# EAGLE board RF (EAGLE 5.11)
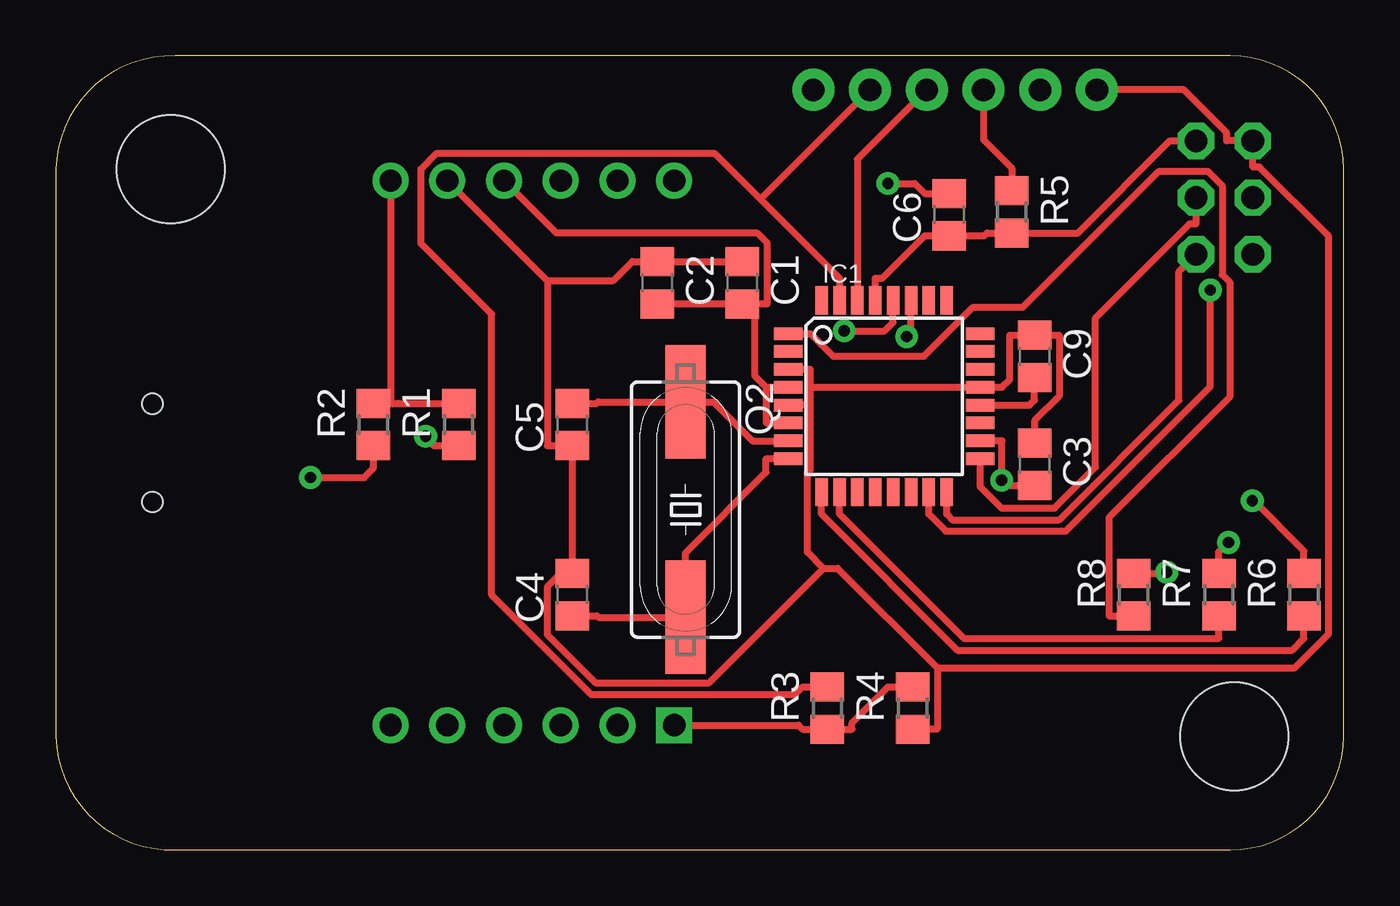
[diagram p0: board, top side]
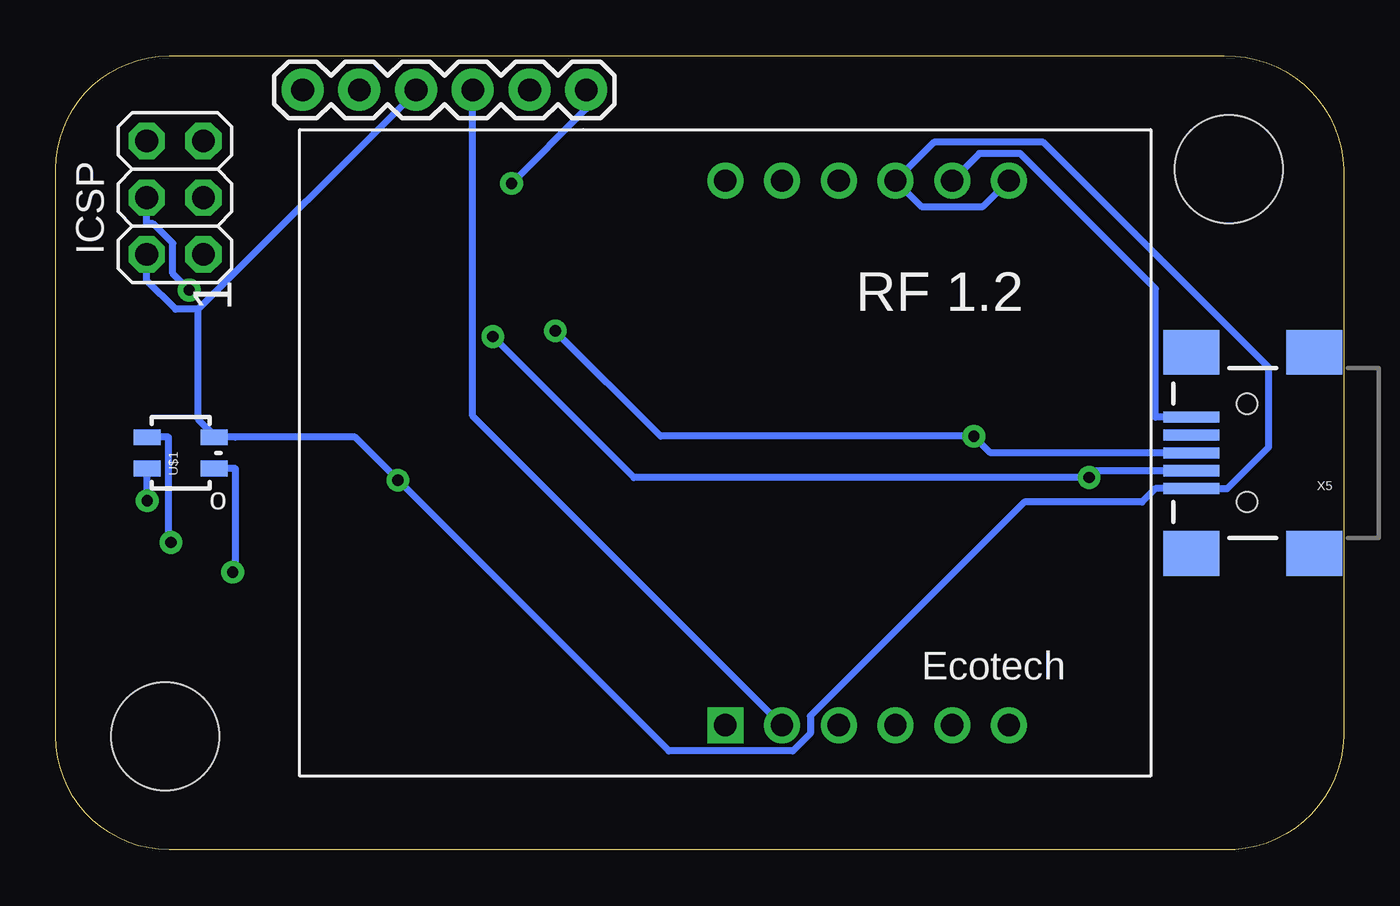
[diagram p1: board, bottom side, seen from below]

Size 57.66 x 35.56 mm. Coordinates in mm from the lower left corner, seen from the top.
Outline: 5.33,0 52.58,0 arc90 57.66,5.08 57.66,30.48 arc90 52.58,35.56 5.33,35.56 arc90 0,30.48 0,5.08 arc90 5.33,0
Copper layers (1*16): Top 0.035mm / dielectric 1.5mm / Bottom 0.035mm
Design rules "SparkFun": minimum track width 8mil, minimum drill 20mil, track to track 8mil, track to pad 8mil, pad to pad 8mil, via to via 8mil, smd to smd 8mil, copper to edge 10mil, drill to drill 8mil, minimum pad ring 12mil, minimum via ring 10mil, stop-mask expansion 4mil, vias tented up to drill 25mil, thermal gap 10mil
Net classes: 0 default: width 0.305 mm, drill 0.305 mm, clearance 0.203 mm; 2 gnd: width 0.305 mm, drill 0.508 mm, clearance 0.203 mm
Holes 4.83 mm at 52.77,5.08 5.14,30.48

## Footprints (pad centres in the part's own frame; a part is rotated, then mirrored left to right if it is on the bottom)
C0805 = smd 1.3 x 1.5: 1 -0.95,0; 2 0.95,0
TQFP32-08 = smd 1.27 x 0.559: 1 -4.293,2.8; 2 -4.293,2; 3 -4.293,1.2; 4 -4.293,0.4; 5 -4.293,-0.4; 6 -4.293,-1.2; 7 -4.293,-2; 8 -4.293,-2.8; 17 4.293,-2.8; 18 4.293,-2; 19 4.293,-1.2; 20 4.293,-0.4; 21 4.293,0.4; 22 4.293,1.2; 23 4.293,2; 24 4.293,2.8 | smd 0.559 x 1.27: 9 -2.8,-4.293; 10 -2,-4.293; 11 -1.2,-4.293; 12 -0.4,-4.293; 13 0.4,-4.293; 14 1.2,-4.293; 15 2,-4.293; 16 2.8,-4.293; 25 2.8,4.293; 26 2,4.293; 27 1.2,4.293; 28 0.4,4.293; 29 -0.4,4.293; 30 -1.2,4.293; 31 -2,4.293; 32 -2.8,4.293
2X03 = drill 1.016 octagon: 1 -2.54,-1.27; 2 -2.54,1.27; 3 0,-1.27; 4 0,1.27; 5 2.54,-1.27; 6 2.54,1.27
FTDI_BASIC = drill 1.016 pad 1.88 round: CTS 10.16,0; DTR 0,0; GND 12.7,0; RXI 2.54,0; TXO 5.08,0; VCC 7.62,0
SM49 = smd 5.08 x 1.778: 1 -4.826,0; 2 4.826,0
R0805 = smd 1.3 x 1.5: 1 -0.95,0; 2 0.95,0
LED-TRICOLOR-SMD = smd 0.7 x 1.2: A 0.7,-1.5; B 0.7,1.5; G -0.7,1.5; R -0.7,-1.5
ECOTECH = drill 1 square: 1 -12.192,1.27 | drill 1 round: 2 -12.192,-1.27; 3 -12.192,-3.81; 4 -12.192,-6.35; 5 -12.192,-8.89; 6 -12.192,-11.43; 7 12.192,-11.43; 8 12.192,-8.89; 9 12.192,-6.35; 10 12.192,-3.81; 11 12.192,-1.27; 12 12.192,1.27
USB-MINIB = smd 2.5 x 0.5: D+ 2.5,0; D- 2.5,0.8; GND 2.5,-1.6; ID 2.5,-0.8; VBUS 2.5,1.6 | smd 2.5 x 2: GND@1 -3,-4.5; GND@2 -3,4.5; GND@3 2.5,4.5; GND@4 2.5,-4.5 | hole 0.9: 0,2.2; 0,-2.2

## Placement (x,y rotation side)
C1  100n  [C0805]  30.73,25.4 270 top
C2  100n  [C0805]  26.92,25.4 270 top
C3  100n  [C0805]  43.81,17.27 270 top
C4  22p  [C0805]  23.11,11.43 90 top
C5  22p  [C0805]  23.11,19.05 270 top
C6  100n  [C0805]  40.01,28.45 90 top
C9  100n  [C0805]  43.81,22.1 90 top
IC1  ATMEGA8  [TQFP32-08]  37.08,20.32 0 top
ICSP  ICSP  [2X03]  52.32,29.21 90 bottom
JP1  FTDI_BASICPTH  [FTDI_BASIC]  33.91,34.04 180 bottom
Q2  16MHz  [SM49]  28.19,15.24 270 top
R1  10K  [R0805]  18.03,19.05 90 top
R2  10K  [R0805]  14.22,19.05 90 top
R3  10K  [R0805]  34.54,6.35 90 top
R4  22k  [R0805]  38.35,6.35 90 top
R5  1K  [R0805]  42.8,28.57 90 top
R6  1K  [R0805]  55.88,11.43 90 top
R7  1K  [R0805]  52.07,11.43 90 top
R8  1K  [R0805]  48.26,11.43 90 top
U$1  LED-TRICOLOR  [LED-TRICOLOR-SMD]  52.07,17.78 90 bottom
U$2  ECOTECH  [ECOTECH]  26.42,17.78 90 bottom
X5  USBSMD  [USB-MINIB]  4.32,17.78 180 bottom

## Library data of the parts
C1-C6 C9 R1-R8 = rcl
IC1 = atmel
ICSP = pinhead
JP1 U$1 X5 = SparkFun
Q2 = crystal
U$2 = Ecotech

## Nets
+5V: C1.2 C2.2 C3.2 IC1.4 IC1.6 IC1.18 ICSP.2 JP1.VCC R1.2 R2.2 R5.2 U$1.A U$2.7 U$2.9 X5.VBUS
BLUE: IC1.10 R7.1
CTS: C6.2 JP1.DTR
GND [gnd]: C1.1 C2.1 C3.1 C4.2 C5.2 C9.2 IC1.3 IC1.5 IC1.21 ICSP.6 JP1.GND R4.1 U$2.8 X5.GND
GREEN: IC1.9 R6.1
MISO: IC1.16 ICSP.1
MOSI: IC1.15 ICSP.4
N$1: IC1.30 JP1.TXO U$2.2
N$2: R6.2 U$1.G
N$3: R7.2 U$1.B
N$4: R8.2 U$1.R
N$5: C9.1 IC1.20
N$6: C5.1 IC1.7 Q2.1
N$7: C4.1 IC1.8 Q2.2
N$8: IC1.27 R2.1 X5.D-
N$9: IC1.28 R1.1 X5.D+
N$11: R3.1 R4.2 U$2.1
N$12: IC1.31 JP1.RXI R3.2
RED: IC1.1 R8.1
RESET: C6.1 IC1.29 ICSP.5 R5.1
SCK: IC1.17 ICSP.3

## Tracks (layer width: path | path; a pad name or v marks a point on that pad's centre or on a via)
+5V  (via drill 0.51 pad 1.02)
  Top 0.305: 31.8,20.72 31.8,19.12 IC1.6 | 31.29,24.45 31.29,21.23 31.8,20.72 | 42.37,16.64 42.34,16.61 v42.34,16.56 | 42.37,16.64 42.37,18.32 IC1.18 | 42.37,16.64 42.4,16.64 42.71,16.32 C3.2 | 31.8,20.72 IC1.4 | 31.29,24.45 31.84,24.45 31.84,27.19 31.39,27.64 22.4,27.64 U$2.9 | 31.29,24.45 C1.2 28.03,24.45 C2.2 | 14.99,20 15.33,20 R1.2 | 14.99,20 R2.2 | U$2.7 14.99,20 | R5.2 42.8,30.53 41.53,31.8 JP1.VCC
  Bottom 0.305: ICSP.2 53.59,25.5 52.3,24.21 51.28,24.21 | JP1.VCC 41.53,33.96 51.28,24.21 | 50.48,18.48 51.28,19.28 51.28,24.21 | 50.48,18.48 50.39,18.48 50.35,18.48 49.61,18.48 44.26,18.48 v42.34,16.56 30.21,4.43 24.66,4.43 23.88,5.21 23.88,6 14.3,15.57 9.03,15.57 8.42,16.18 X5.VBUS 6.01,16.18 5.21,16.18 3.35,18.04 3.35,21.59 13.45,31.69 18.35,31.69 U$2.9 18.9,28.81 16.15,28.81 U$2.7 | 50.48,18.48 U$1.A
BLUE
  Top 0.305: IC1.10 35.08,15.04 40.65,9.47 52.07,9.47 R7.1
CTS  (via drill 0.51 pad 1.02)
  Top 0.305: C6.2 38.9,29.4 38.46,29.84 v37.25,29.84
  Bottom 0.305: JP1.DTR 33.91,33.19 v37.25,29.84
GND
  Top 0.305: 34.37,12.61 33.65,13.34 33.65,16.89 33.78,17.02 33.78,19.92 | 23.11,12.88 22,11.77 22,9.65 24.16,7.49 29.25,7.49 34.37,12.61 | 39.46,8.15 35,12.61 34.37,12.61 | 23.11,12.88 23.11,13.39 23.11,17.09 C5.2 22.01,18.1 22.01,25.5 | 23.11,12.88 C4.2 | 22.01,25.5 24.96,25.5 25.82,26.35 C2.1 C1.1 | 22.01,25.5 22,25.5 U$2.8 | 33.78,20.72 IC1.21 42.37,20.72 42.71,21.06 42.71,23.05 C9.2 44.92,23.05 44.92,20.33 43.81,19.23 C3.1 | 33.78,20.72 33.78,21.52 IC1.3 | 33.78,19.92 33.78,20.72 | 39.46,8.15 55.48,8.15 56.99,9.66 56.99,27.48 53.89,30.58 53.59,30.58 ICSP.6 53.3,31.75 52.42,31.75 52.42,32.11 50.5,34.04 JP1.GND | 39.46,8.15 39.46,5.4 R4.1 | 33.78,19.92 IC1.5
  Bottom 0.305: X5.GND 8.42,19.38 8.42,25.13 14.48,31.18 16.31,31.18 U$2.8
GREEN
  Top 0.305: IC1.9 34.28,15.04 40.38,8.95 55.35,8.95 55.88,9.47 R6.1
MISO
  Top 0.305: IC1.16 39.88,15.04 40.14,14.78 44.92,14.78 50.28,20.14 50.28,25.9 ICSP.1
MOSI  (via drill 0.51 pad 1.02)
  Top 0.305: v51.69,25.07 51.69,20.75 45.21,14.27 39.85,14.27 39.08,15.04 IC1.15
  Bottom 0.305: ICSP.4 53.59,28.04 53.3,28.04 52.42,27.16 52.42,25.81 v51.69,25.07
N$1
  Top 0.305: JP1.TXO 35.88,30.93 IC1.30
  Bottom 0.305: U$2.2 38.99,19.43 JP1.TXO
N$2  (via drill 0.51 pad 1.02)
  Top 0.305: v53.57,15.64 53.62,15.64 55.88,13.39 R6.2
  Bottom 0.305: v53.57,15.64 U$1.G
N$3  (via drill 0.51 pad 1.02)
  Top 0.305: v52.5,13.77 52.11,13.39 52.07,13.39 R7.2
  Bottom 0.305: v52.5,13.77 52.61,13.89 52.61,18.48 U$1.B
N$4  (via drill 0.51 pad 1.02)
  Top 0.305: v49.74,12.43 49.42,12.43 49.37,12.38 R8.2
  Bottom 0.305: v49.74,12.43 49.61,12.56 49.61,17.08 U$1.R
N$5
  Top 0.305: C9.1 43.81,20.14 43.59,19.92 IC1.20
N$6
  Top 0.305: IC1.7 31.18,18.32 29.44,20.07 Q2.1 24.29,20.07 24.22,20 C5.1
N$7
  Top 0.305: IC1.8 31.8,17.52 31.8,16.92 28.19,13.31 Q2.2 24.29,10.41 24.22,10.48 C4.1
N$8  (via drill 0.51 pad 1.02)
  Top 0.305: v38.09,22.99 38.28,23.19 IC1.27 | R2.1 14.22,17.09 13.81,16.68 v11.39,16.68
  Bottom 0.305: v38.09,22.99 31.77,16.68 v11.39,16.68 11.09,16.98 X5.D-
N$9  (via drill 0.51 pad 1.02)
  Top 0.305: IC1.28 37.48,23.62 37.1,23.24 v35.3,23.24 | v16.56,18.52 16.93,18.15 16.93,18.1 R1.1
  Bottom 0.305: v35.3,23.24 30.58,18.52 v16.56,18.52 15.81,17.78 X5.D+
N$11
  Top 0.305: R4.2 37.25,7.3 35.65,5.7 35.65,5.4 R3.1 33.44,5.4 33.25,5.59 U$2.1
N$12
  Top 0.305: R3.2 33.44,7.3 33.09,6.96 23.97,6.96 19.51,11.42 19.51,23.99 16.35,27.15 16.35,30.49 17.05,31.2 29.49,31.2 31.55,29.14 | 31.55,29.14 35.08,25.6 IC1.31 | 31.55,29.14 JP1.RXI
RED
  Top 0.305: IC1.1 33.78,23.12 34.8,22.11 38.87,22.11 41.07,24.3 43.29,24.3 49.38,30.39 51.58,30.39 52.22,29.75 52.22,25.76 52.55,25.43 52.55,20.27 47.15,14.88 47.15,10.48 R8.1
RESET
  Top 0.305: ICSP.5 49.89,31.75 45.76,27.62 R5.1 41.69,27.62 41.57,27.5 41.11,27.5 C6.1 38.9,27.5 37.01,25.6 36.68,25.6 IC1.29
SCK
  Top 0.305: IC1.17 41.38,16.27 42.34,15.31 44.72,15.31 46.54,17.14 46.54,23.82 50.76,28.04 51.05,28.04 ICSP.3

## Text on the board
bPlace: RF 1.2 | o
bNames: 1